# Altium PCB Omid Mazarei.PcbDoc (part 1 of 3)
Units mm, origin at the board's own origin, x right, y up, seen from the top; angles counter-clockwise.
Board outline 297 x 210 mm, 2 copper layers (Top Layer, Bottom Layer); 469 components, 0 nets, 938 pads, 2 vias.
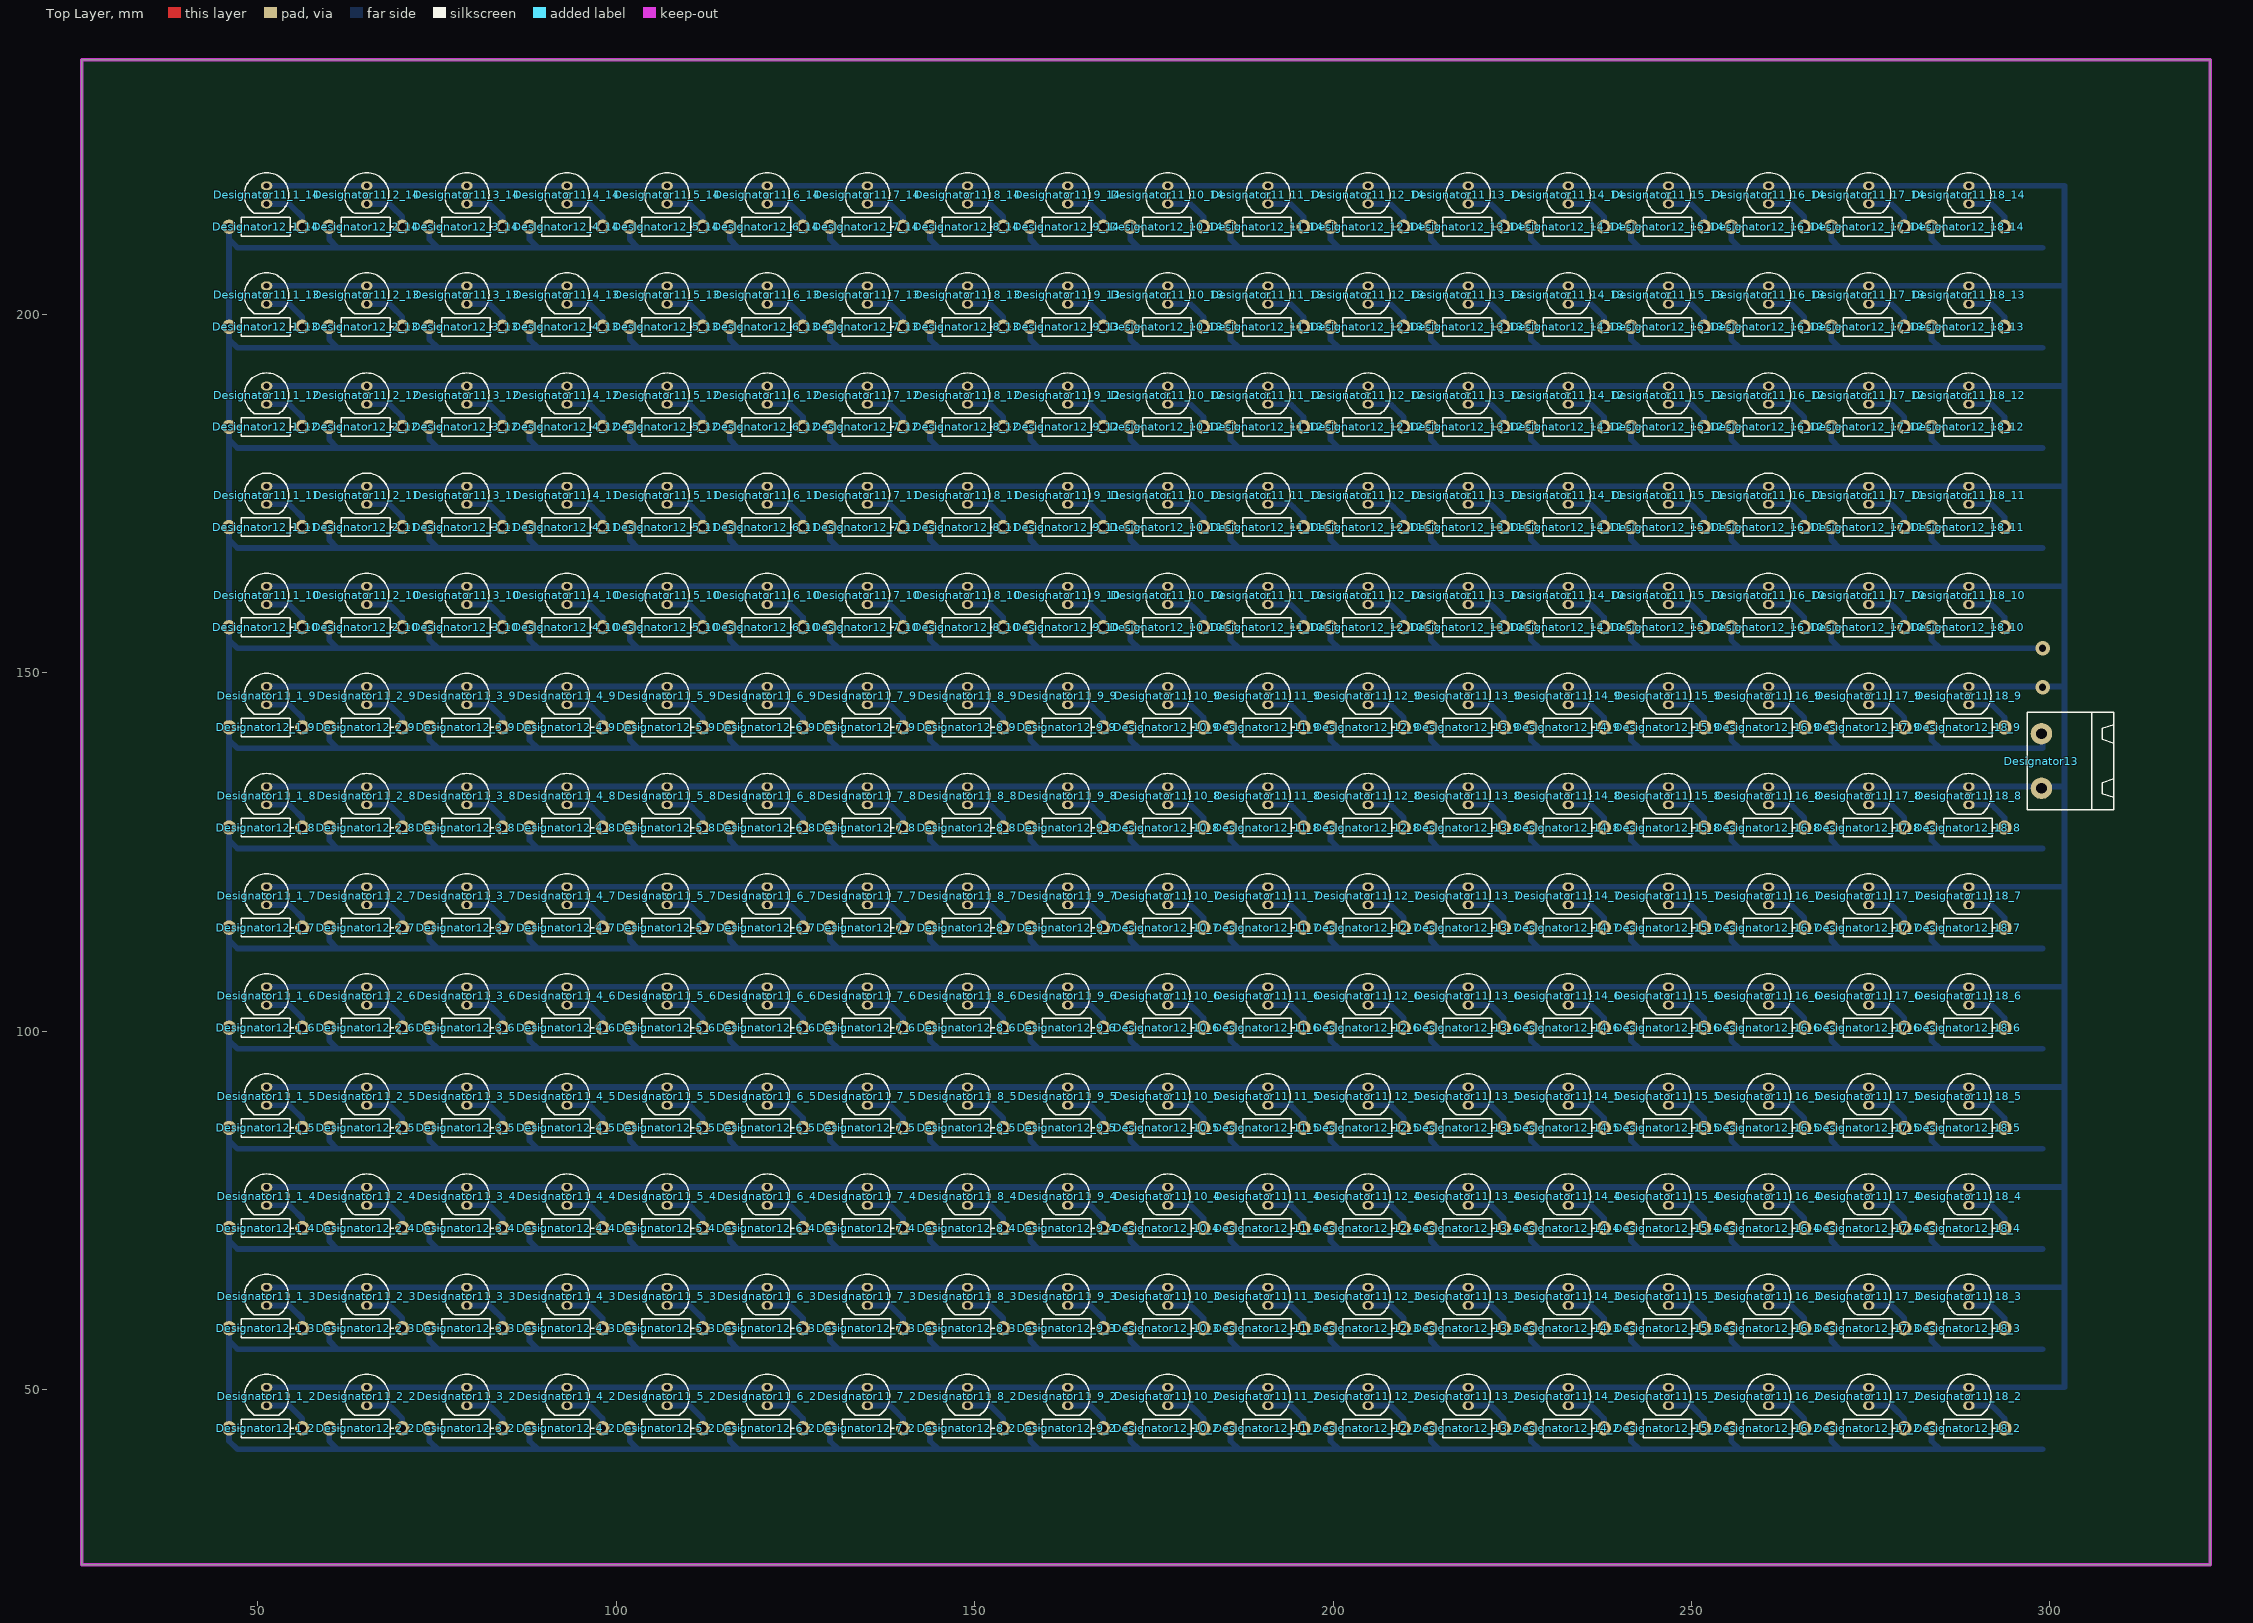
[diagram p0: Top Layer view]
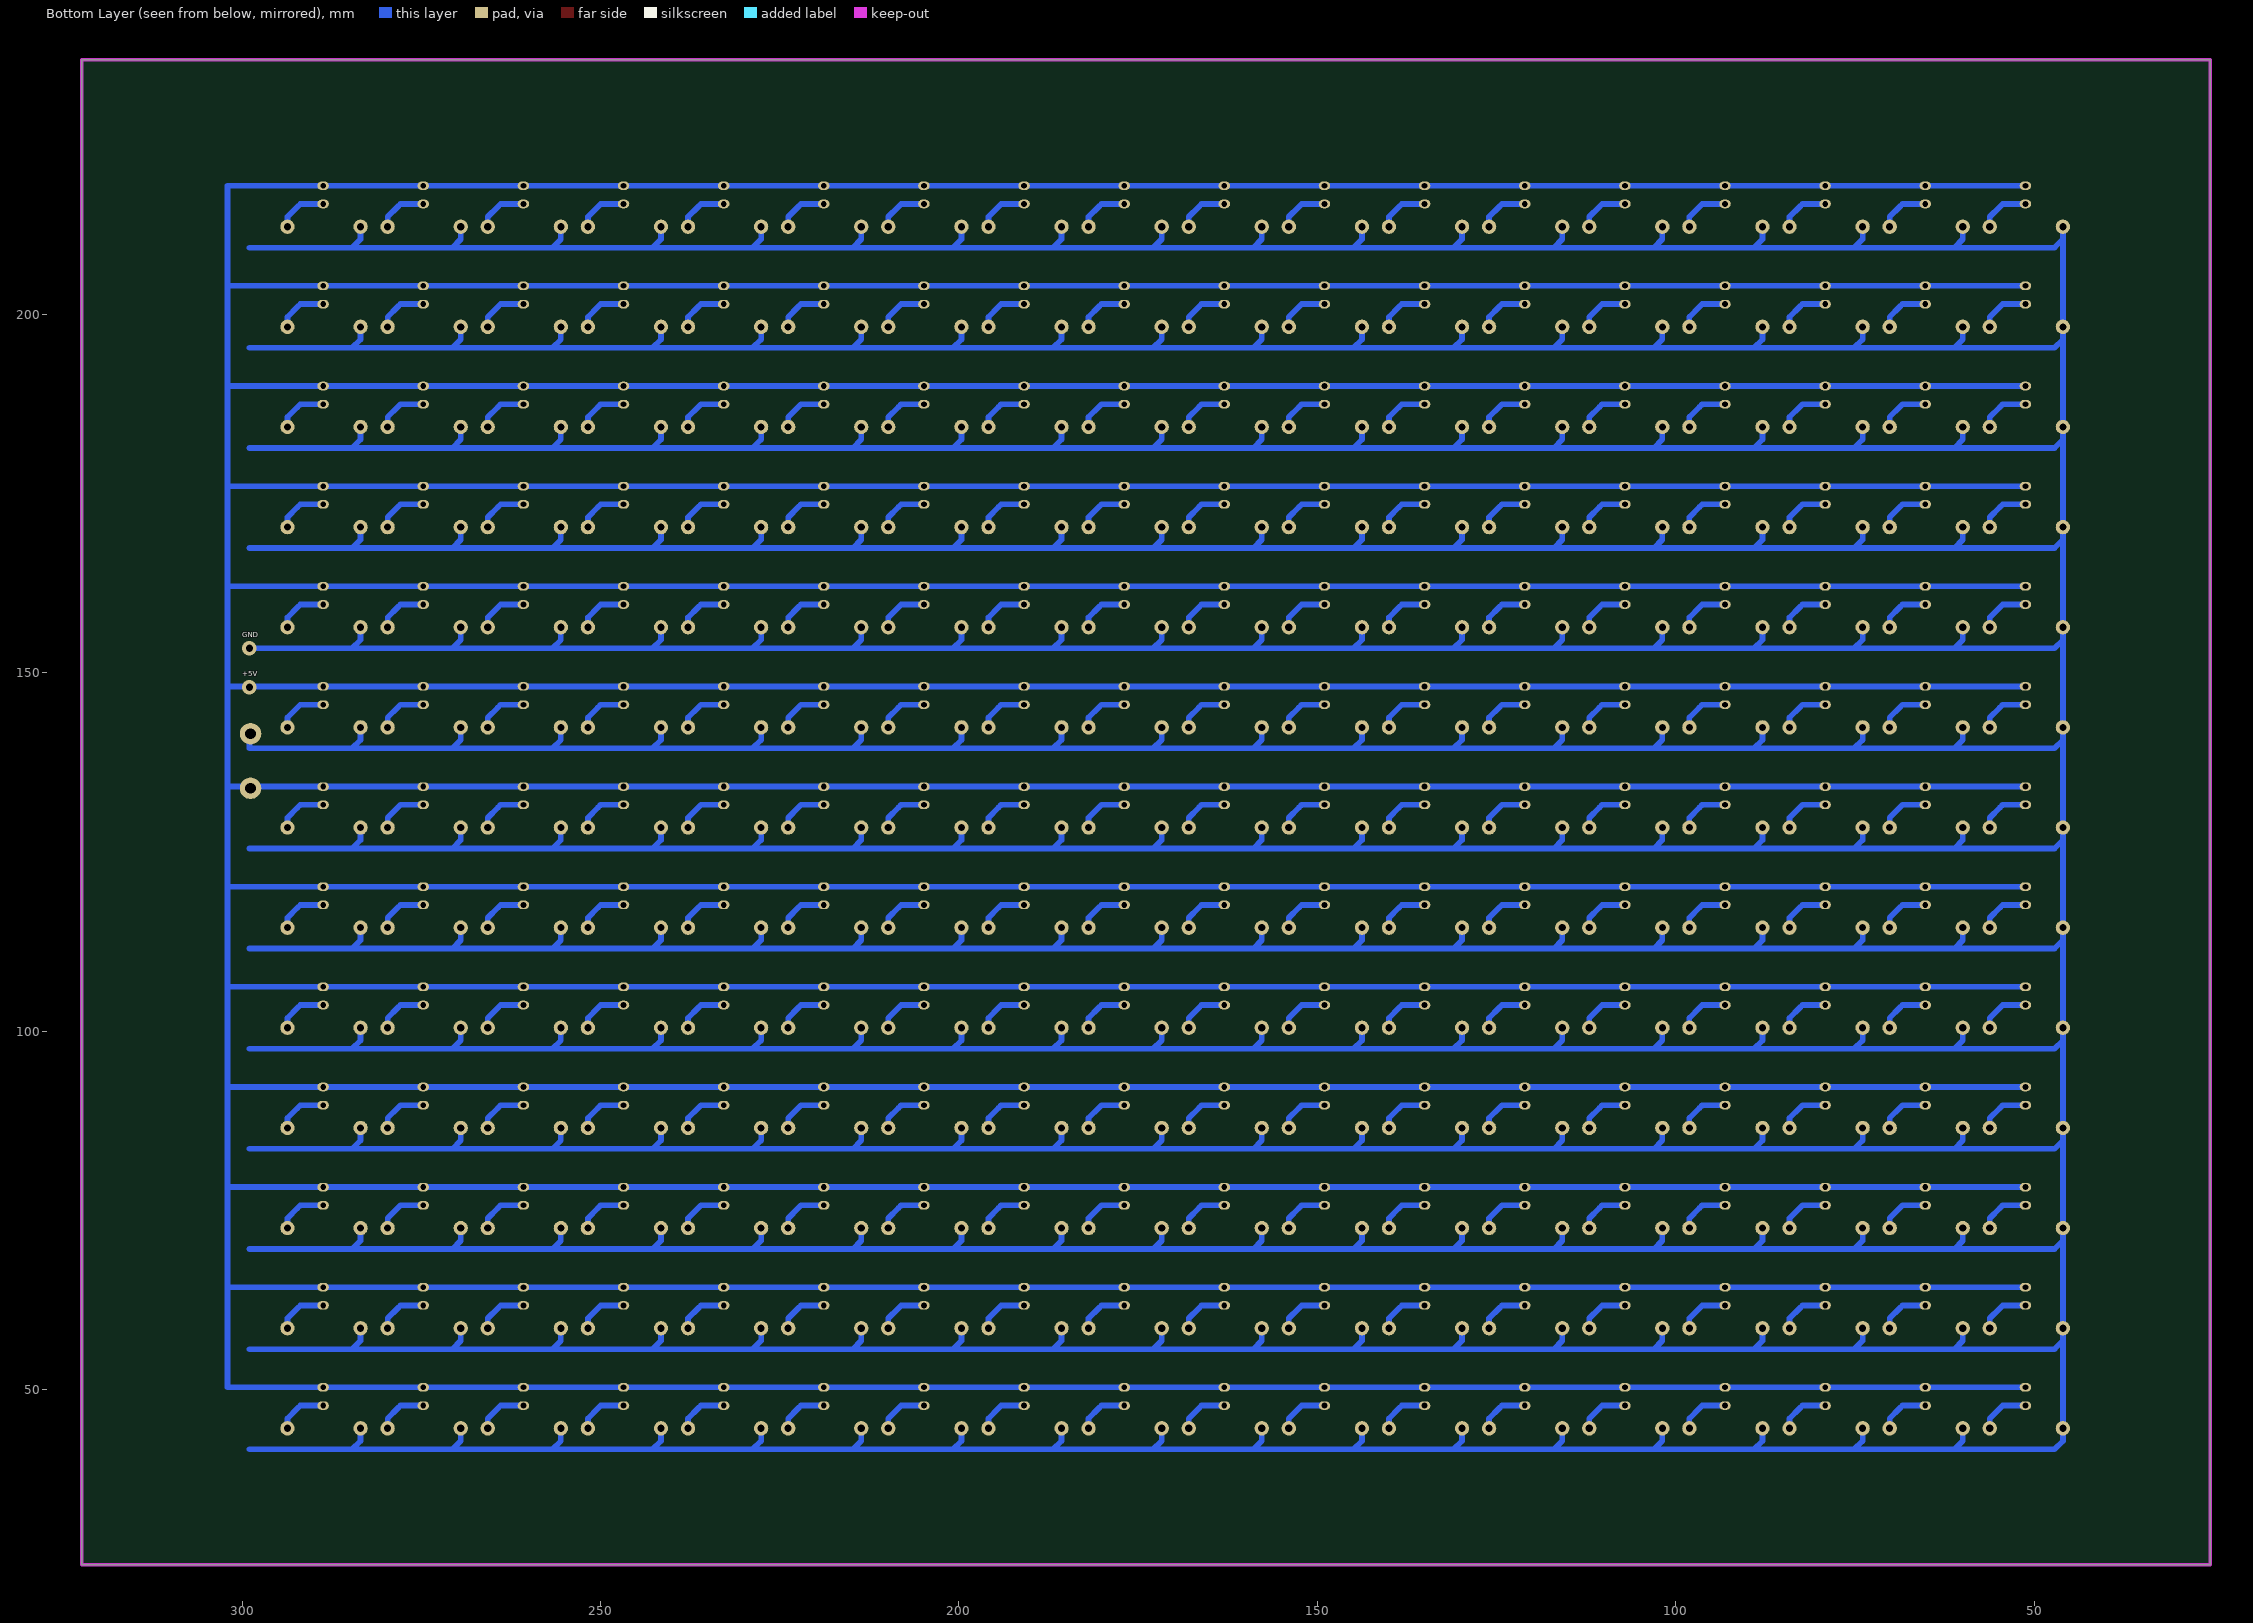
[diagram p1: Bottom Layer view, seen from below]

## Layer stack, top to bottom
Top Solder: solder mask 0.0102, Solder Resist, Dk 3.5
Top Layer: signal copper 0.0356
Dielectric 1: dielectric 0.32, FR-4, Dk 4.8
Bottom Layer: signal copper 0.0356
Bottom Solder: solder mask 0.0102, Solder Resist, Dk 3.5

## Board outline
25.4,25.527 322.4,25.527 322.4,235.527 25.4,235.527

## Design rules (kind name [scope] priority, off if disabled: settings)
Clearance [All] p1: gap=0.254 ignorepadtopadclearanceinfootprint=FALSE except(0: Arc-Hole Track-Hole SMDPad-Hole THPad-Hole Via-Hole Fill-Hole Poly-Hole Region-Hole Text-Hole)
PolygonConnect [All] p1: connectstyle=Relief reliefconductorwidth=0.254 reliefentries=4 polygonreliefangle="90 Angle" airgapwidth=0.254
RoutingVias [All] p1: holewidth=0.711 width=1.27 viastyle="Through Hole" minholewidth=0.711 minwidth=1.27 maxholewidth=1 maxwidth=2
ShortCircuit [All] p1: allowed=TRUE
SolderMaskExpansion [All] p1: expansion=0.102 istentingtop=FALSE
Width [All] p1: maxlimit=0.8 minlimit=0.254 preferedwidth=0.254
29 further rules are at their usual default settings.

## Components (designator, comment, footprint, x,y, rotation, side; value= is the part's Value field where it differs from the comment)
Designator11_1_2 "Comment" LED5MM_RED 51.21,49.014 r270 top
Designator11_1_3 "Comment" LED5MM_RED 51.21,62.984 r270 top
Designator11_1_4 "Comment" LED5MM_RED 51.21,76.954 r270 top
Designator11_1_5 "Comment" LED5MM_RED 51.21,90.924 r270 top
Designator11_1_6 "Comment" LED5MM_RED 51.21,104.894 r270 top
Designator11_1_7 "Comment" LED5MM_RED 51.21,118.864 r270 top
Designator11_1_8 "Comment" LED5MM_RED 51.21,132.834 r270 top
Designator11_1_9 "Comment" LED5MM_RED 51.21,146.804 r270 top
Designator11_1_10 "Comment" LED5MM_RED 51.21,160.774 r270 top
Designator11_1_11 "Comment" LED5MM_RED 51.21,174.744 r270 top
Designator11_1_12 "Comment" LED5MM_RED 51.21,188.714 r270 top
Designator11_1_13 "Comment" LED5MM_RED 51.21,202.684 r270 top
Designator11_1_14 "Comment" LED5MM_RED 51.21,216.654 r270 top
Designator11_2_2 "Comment" LED5MM_RED 65.18,49.014 r270 top
Designator11_2_3 "Comment" LED5MM_RED 65.18,62.984 r270 top
Designator11_2_4 "Comment" LED5MM_RED 65.18,76.954 r270 top
Designator11_2_5 "Comment" LED5MM_RED 65.18,90.924 r270 top
Designator11_2_6 "Comment" LED5MM_RED 65.18,104.894 r270 top
Designator11_2_7 "Comment" LED5MM_RED 65.18,118.864 r270 top
Designator11_2_8 "Comment" LED5MM_RED 65.18,132.834 r270 top
Designator11_2_9 "Comment" LED5MM_RED 65.18,146.804 r270 top
Designator11_2_10 "Comment" LED5MM_RED 65.18,160.774 r270 top
Designator11_2_11 "Comment" LED5MM_RED 65.18,174.744 r270 top
Designator11_2_12 "Comment" LED5MM_RED 65.18,188.714 r270 top
Designator11_2_13 "Comment" LED5MM_RED 65.18,202.684 r270 top
Designator11_2_14 "Comment" LED5MM_RED 65.18,216.654 r270 top
Designator11_3_2 "Comment" LED5MM_RED 79.15,49.014 r270 top
Designator11_3_3 "Comment" LED5MM_RED 79.15,62.984 r270 top
Designator11_3_4 "Comment" LED5MM_RED 79.15,76.954 r270 top
Designator11_3_5 "Comment" LED5MM_RED 79.15,90.924 r270 top
Designator11_3_6 "Comment" LED5MM_RED 79.15,104.894 r270 top
Designator11_3_7 "Comment" LED5MM_RED 79.15,118.864 r270 top
Designator11_3_8 "Comment" LED5MM_RED 79.15,132.834 r270 top
Designator11_3_9 "Comment" LED5MM_RED 79.15,146.804 r270 top
Designator11_3_10 "Comment" LED5MM_RED 79.15,160.774 r270 top
Designator11_3_11 "Comment" LED5MM_RED 79.15,174.744 r270 top
Designator11_3_12 "Comment" LED5MM_RED 79.15,188.714 r270 top
Designator11_3_13 "Comment" LED5MM_RED 79.15,202.684 r270 top
Designator11_3_14 "Comment" LED5MM_RED 79.15,216.654 r270 top
Designator11_4_2 "Comment" LED5MM_RED 93.12,49.014 r270 top
Designator11_4_3 "Comment" LED5MM_RED 93.12,62.984 r270 top
Designator11_4_4 "Comment" LED5MM_RED 93.12,76.954 r270 top
Designator11_4_5 "Comment" LED5MM_RED 93.12,90.924 r270 top
Designator11_4_6 "Comment" LED5MM_RED 93.12,104.894 r270 top
Designator11_4_7 "Comment" LED5MM_RED 93.12,118.864 r270 top
Designator11_4_8 "Comment" LED5MM_RED 93.12,132.834 r270 top
Designator11_4_9 "Comment" LED5MM_RED 93.12,146.804 r270 top
Designator11_4_10 "Comment" LED5MM_RED 93.12,160.774 r270 top
Designator11_4_11 "Comment" LED5MM_RED 93.12,174.744 r270 top
Designator11_4_12 "Comment" LED5MM_RED 93.12,188.714 r270 top
Designator11_4_13 "Comment" LED5MM_RED 93.12,202.684 r270 top
Designator11_4_14 "Comment" LED5MM_RED 93.12,216.654 r270 top
Designator11_5_2 "Comment" LED5MM_RED 107.09,49.014 r270 top
Designator11_5_3 "Comment" LED5MM_RED 107.09,62.984 r270 top
Designator11_5_4 "Comment" LED5MM_RED 107.09,76.954 r270 top
Designator11_5_5 "Comment" LED5MM_RED 107.09,90.924 r270 top
Designator11_5_6 "Comment" LED5MM_RED 107.09,104.894 r270 top
Designator11_5_7 "Comment" LED5MM_RED 107.09,118.864 r270 top
Designator11_5_8 "Comment" LED5MM_RED 107.09,132.834 r270 top
Designator11_5_9 "Comment" LED5MM_RED 107.09,146.804 r270 top
Designator11_5_10 "Comment" LED5MM_RED 107.09,160.774 r270 top
Designator11_5_11 "Comment" LED5MM_RED 107.09,174.744 r270 top
Designator11_5_12 "Comment" LED5MM_RED 107.09,188.714 r270 top
Designator11_5_13 "Comment" LED5MM_RED 107.09,202.684 r270 top
Designator11_5_14 "Comment" LED5MM_RED 107.09,216.654 r270 top
Designator11_6_2 "Comment" LED5MM_RED 121.06,49.014 r270 top
Designator11_6_3 "Comment" LED5MM_RED 121.06,62.984 r270 top
Designator11_6_4 "Comment" LED5MM_RED 121.06,76.954 r270 top
Designator11_6_5 "Comment" LED5MM_RED 121.06,90.924 r270 top
Designator11_6_6 "Comment" LED5MM_RED 121.06,104.894 r270 top
Designator11_6_7 "Comment" LED5MM_RED 121.06,118.864 r270 top
Designator11_6_8 "Comment" LED5MM_RED 121.06,132.834 r270 top
Designator11_6_9 "Comment" LED5MM_RED 121.06,146.804 r270 top
Designator11_6_10 "Comment" LED5MM_RED 121.06,160.774 r270 top
Designator11_6_11 "Comment" LED5MM_RED 121.06,174.744 r270 top
Designator11_6_12 "Comment" LED5MM_RED 121.06,188.714 r270 top
Designator11_6_13 "Comment" LED5MM_RED 121.06,202.684 r270 top
Designator11_6_14 "Comment" LED5MM_RED 121.06,216.654 r270 top
Designator11_7_2 "Comment" LED5MM_RED 135.03,49.014 r270 top
Designator11_7_3 "Comment" LED5MM_RED 135.03,62.984 r270 top
Designator11_7_4 "Comment" LED5MM_RED 135.03,76.954 r270 top
Designator11_7_5 "Comment" LED5MM_RED 135.03,90.924 r270 top
Designator11_7_6 "Comment" LED5MM_RED 135.03,104.894 r270 top
Designator11_7_7 "Comment" LED5MM_RED 135.03,118.864 r270 top
Designator11_7_8 "Comment" LED5MM_RED 135.03,132.834 r270 top
Designator11_7_9 "Comment" LED5MM_RED 135.03,146.804 r270 top
Designator11_7_10 "Comment" LED5MM_RED 135.03,160.774 r270 top
Designator11_7_11 "Comment" LED5MM_RED 135.03,174.744 r270 top
Designator11_7_12 "Comment" LED5MM_RED 135.03,188.714 r270 top
Designator11_7_13 "Comment" LED5MM_RED 135.03,202.684 r270 top
Designator11_7_14 "Comment" LED5MM_RED 135.03,216.654 r270 top
Designator11_8_2 "Comment" LED5MM_RED 149,49.014 r270 top
Designator11_8_3 "Comment" LED5MM_RED 149,62.984 r270 top
Designator11_8_4 "Comment" LED5MM_RED 149,76.954 r270 top
Designator11_8_5 "Comment" LED5MM_RED 149,90.924 r270 top
Designator11_8_6 "Comment" LED5MM_RED 149,104.894 r270 top
Designator11_8_7 "Comment" LED5MM_RED 149,118.864 r270 top
Designator11_8_8 "Comment" LED5MM_RED 149,132.834 r270 top
Designator11_8_9 "Comment" LED5MM_RED 149,146.804 r270 top
Designator11_8_10 "Comment" LED5MM_RED 149,160.774 r270 top
Designator11_8_11 "Comment" LED5MM_RED 149,174.744 r270 top
Designator11_8_12 "Comment" LED5MM_RED 149,188.714 r270 top
Designator11_8_13 "Comment" LED5MM_RED 149,202.684 r270 top
Designator11_8_14 "Comment" LED5MM_RED 149,216.654 r270 top
Designator11_9_2 "Comment" LED5MM_RED 162.97,49.014 r270 top
Designator11_9_3 "Comment" LED5MM_RED 162.97,62.984 r270 top
Designator11_9_4 "Comment" LED5MM_RED 162.97,76.954 r270 top
Designator11_9_5 "Comment" LED5MM_RED 162.97,90.924 r270 top
Designator11_9_6 "Comment" LED5MM_RED 162.97,104.894 r270 top
Designator11_9_7 "Comment" LED5MM_RED 162.97,118.864 r270 top
Designator11_9_8 "Comment" LED5MM_RED 162.97,132.834 r270 top
Designator11_9_9 "Comment" LED5MM_RED 162.97,146.804 r270 top
Designator11_9_10 "Comment" LED5MM_RED 162.97,160.774 r270 top
Designator11_9_11 "Comment" LED5MM_RED 162.97,174.744 r270 top
Designator11_9_12 "Comment" LED5MM_RED 162.97,188.714 r270 top
Designator11_9_13 "Comment" LED5MM_RED 162.97,202.684 r270 top
Designator11_9_14 "Comment" LED5MM_RED 162.97,216.654 r270 top
Designator11_10_2 "Comment" LED5MM_RED 176.94,49.014 r270 top
Designator11_10_3 "Comment" LED5MM_RED 176.94,62.984 r270 top
Designator11_10_4 "Comment" LED5MM_RED 176.94,76.954 r270 top
Designator11_10_5 "Comment" LED5MM_RED 176.94,90.924 r270 top
Designator11_10_6 "Comment" LED5MM_RED 176.94,104.894 r270 top
Designator11_10_7 "Comment" LED5MM_RED 176.94,118.864 r270 top
Designator11_10_8 "Comment" LED5MM_RED 176.94,132.834 r270 top
Designator11_10_9 "Comment" LED5MM_RED 176.94,146.804 r270 top
Designator11_10_10 "Comment" LED5MM_RED 176.94,160.774 r270 top
Designator11_10_11 "Comment" LED5MM_RED 176.94,174.744 r270 top
Designator11_10_12 "Comment" LED5MM_RED 176.94,188.714 r270 top
Designator11_10_13 "Comment" LED5MM_RED 176.94,202.684 r270 top
Designator11_10_14 "Comment" LED5MM_RED 176.94,216.654 r270 top
Designator11_11_2 "Comment" LED5MM_RED 190.91,49.014 r270 top
Designator11_11_3 "Comment" LED5MM_RED 190.91,62.984 r270 top
Designator11_11_4 "Comment" LED5MM_RED 190.91,76.954 r270 top
Designator11_11_5 "Comment" LED5MM_RED 190.91,90.924 r270 top
Designator11_11_6 "Comment" LED5MM_RED 190.91,104.894 r270 top
Designator11_11_7 "Comment" LED5MM_RED 190.91,118.864 r270 top
Designator11_11_8 "Comment" LED5MM_RED 190.91,132.834 r270 top
Designator11_11_9 "Comment" LED5MM_RED 190.91,146.804 r270 top
Designator11_11_10 "Comment" LED5MM_RED 190.91,160.774 r270 top
Designator11_11_11 "Comment" LED5MM_RED 190.91,174.744 r270 top
Designator11_11_12 "Comment" LED5MM_RED 190.91,188.714 r270 top
Designator11_11_13 "Comment" LED5MM_RED 190.91,202.684 r270 top
Designator11_11_14 "Comment" LED5MM_RED 190.91,216.654 r270 top
Designator11_12_2 "Comment" LED5MM_RED 204.88,49.014 r270 top
Designator11_12_3 "Comment" LED5MM_RED 204.88,62.984 r270 top
Designator11_12_4 "Comment" LED5MM_RED 204.88,76.954 r270 top
Designator11_12_5 "Comment" LED5MM_RED 204.88,90.924 r270 top
Designator11_12_6 "Comment" LED5MM_RED 204.88,104.894 r270 top
Designator11_12_7 "Comment" LED5MM_RED 204.88,118.864 r270 top
Designator11_12_8 "Comment" LED5MM_RED 204.88,132.834 r270 top
Designator11_12_9 "Comment" LED5MM_RED 204.88,146.804 r270 top
Designator11_12_10 "Comment" LED5MM_RED 204.88,160.774 r270 top
Designator11_12_11 "Comment" LED5MM_RED 204.88,174.744 r270 top
Designator11_12_12 "Comment" LED5MM_RED 204.88,188.714 r270 top
Designator11_12_13 "Comment" LED5MM_RED 204.88,202.684 r270 top
Designator11_12_14 "Comment" LED5MM_RED 204.88,216.654 r270 top
Designator11_13_2 "Comment" LED5MM_RED 218.85,49.014 r270 top
Designator11_13_3 "Comment" LED5MM_RED 218.85,62.984 r270 top
Designator11_13_4 "Comment" LED5MM_RED 218.85,76.954 r270 top
Designator11_13_5 "Comment" LED5MM_RED 218.85,90.924 r270 top
Designator11_13_6 "Comment" LED5MM_RED 218.85,104.894 r270 top
Designator11_13_7 "Comment" LED5MM_RED 218.85,118.864 r270 top
Designator11_13_8 "Comment" LED5MM_RED 218.85,132.834 r270 top
Designator11_13_9 "Comment" LED5MM_RED 218.85,146.804 r270 top
Designator11_13_10 "Comment" LED5MM_RED 218.85,160.774 r270 top
Designator11_13_11 "Comment" LED5MM_RED 218.85,174.744 r270 top
Designator11_13_12 "Comment" LED5MM_RED 218.85,188.714 r270 top
Designator11_13_13 "Comment" LED5MM_RED 218.85,202.684 r270 top
Designator11_13_14 "Comment" LED5MM_RED 218.85,216.654 r270 top
Designator11_14_2 "Comment" LED5MM_RED 232.82,49.014 r270 top
Designator11_14_3 "Comment" LED5MM_RED 232.82,62.984 r270 top
Designator11_14_4 "Comment" LED5MM_RED 232.82,76.954 r270 top
Designator11_14_5 "Comment" LED5MM_RED 232.82,90.924 r270 top
Designator11_14_6 "Comment" LED5MM_RED 232.82,104.894 r270 top
Designator11_14_7 "Comment" LED5MM_RED 232.82,118.864 r270 top
Designator11_14_8 "Comment" LED5MM_RED 232.82,132.834 r270 top
Designator11_14_9 "Comment" LED5MM_RED 232.82,146.804 r270 top
Designator11_14_10 "Comment" LED5MM_RED 232.82,160.774 r270 top
Designator11_14_11 "Comment" LED5MM_RED 232.82,174.744 r270 top
Designator11_14_12 "Comment" LED5MM_RED 232.82,188.714 r270 top
Designator11_14_13 "Comment" LED5MM_RED 232.82,202.684 r270 top
Designator11_14_14 "Comment" LED5MM_RED 232.82,216.654 r270 top
Designator11_15_2 "Comment" LED5MM_RED 246.79,49.014 r270 top
Designator11_15_3 "Comment" LED5MM_RED 246.79,62.984 r270 top
Designator11_15_4 "Comment" LED5MM_RED 246.79,76.954 r270 top
Designator11_15_5 "Comment" LED5MM_RED 246.79,90.924 r270 top
Designator11_15_6 "Comment" LED5MM_RED 246.79,104.894 r270 top
Designator11_15_7 "Comment" LED5MM_RED 246.79,118.864 r270 top
Designator11_15_8 "Comment" LED5MM_RED 246.79,132.834 r270 top
Designator11_15_9 "Comment" LED5MM_RED 246.79,146.804 r270 top
Designator11_15_10 "Comment" LED5MM_RED 246.79,160.774 r270 top
Designator11_15_11 "Comment" LED5MM_RED 246.79,174.744 r270 top
Designator11_15_12 "Comment" LED5MM_RED 246.79,188.714 r270 top
Designator11_15_13 "Comment" LED5MM_RED 246.79,202.684 r270 top
Designator11_15_14 "Comment" LED5MM_RED 246.79,216.654 r270 top
Designator11_16_2 "Comment" LED5MM_RED 260.76,49.014 r270 top
Designator11_16_3 "Comment" LED5MM_RED 260.76,62.984 r270 top
Designator11_16_4 "Comment" LED5MM_RED 260.76,76.954 r270 top
Designator11_16_5 "Comment" LED5MM_RED 260.76,90.924 r270 top
Designator11_16_6 "Comment" LED5MM_RED 260.76,104.894 r270 top
Designator11_16_7 "Comment" LED5MM_RED 260.76,118.864 r270 top
Designator11_16_8 "Comment" LED5MM_RED 260.76,132.834 r270 top
Designator11_16_9 "Comment" LED5MM_RED 260.76,146.804 r270 top
Designator11_16_10 "Comment" LED5MM_RED 260.76,160.774 r270 top
Designator11_16_11 "Comment" LED5MM_RED 260.76,174.744 r270 top
Designator11_16_12 "Comment" LED5MM_RED 260.76,188.714 r270 top
Designator11_16_13 "Comment" LED5MM_RED 260.76,202.684 r270 top
Designator11_16_14 "Comment" LED5MM_RED 260.76,216.654 r270 top
Designator11_17_2 "Comment" LED5MM_RED 274.73,49.014 r270 top
Designator11_17_3 "Comment" LED5MM_RED 274.73,62.984 r270 top
Designator11_17_4 "Comment" LED5MM_RED 274.73,76.954 r270 top
Designator11_17_5 "Comment" LED5MM_RED 274.73,90.924 r270 top
Designator11_17_6 "Comment" LED5MM_RED 274.73,104.894 r270 top
Designator11_17_7 "Comment" LED5MM_RED 274.73,118.864 r270 top
Designator11_17_8 "Comment" LED5MM_RED 274.73,132.834 r270 top
Designator11_17_9 "Comment" LED5MM_RED 274.73,146.804 r270 top
Designator11_17_10 "Comment" LED5MM_RED 274.73,160.774 r270 top
Designator11_17_11 "Comment" LED5MM_RED 274.73,174.744 r270 top
Designator11_17_12 "Comment" LED5MM_RED 274.73,188.714 r270 top
Designator11_17_13 "Comment" LED5MM_RED 274.73,202.684 r270 top
Designator11_17_14 "Comment" LED5MM_RED 274.73,216.654 r270 top
Designator11_18_2 "Comment" LED5MM_RED 288.7,49.014 r270 top
Designator11_18_3 "Comment" LED5MM_RED 288.7,62.984 r270 top
Designator11_18_4 "Comment" LED5MM_RED 288.7,76.954 r270 top
Designator11_18_5 "Comment" LED5MM_RED 288.7,90.924 r270 top
Designator11_18_6 "Comment" LED5MM_RED 288.7,104.894 r270 top
Designator11_18_7 "Comment" LED5MM_RED 288.7,118.864 r270 top
Designator11_18_8 "Comment" LED5MM_RED 288.7,132.834 r270 top
Designator11_18_9 "Comment" LED5MM_RED 288.7,146.804 r270 top
Designator11_18_10 "Comment" LED5MM_RED 288.7,160.774 r270 top
Designator11_18_11 "Comment" LED5MM_RED 288.7,174.744 r270 top
Designator11_18_12 "Comment" LED5MM_RED 288.7,188.714 r270 top
Designator11_18_13 "Comment" LED5MM_RED 288.7,202.684 r270 top
Designator11_18_14 "Comment" LED5MM_RED 288.7,216.654 r270 top
Designator12_1_2 "1K" R025W_AX04 51.083,44.569 r0 top
Designator12_1_3 "1K" R025W_AX04 51.083,58.539 r0 top
Designator12_1_4 "1K" R025W_AX04 51.083,72.509 r0 top
Designator12_1_5 "1K" R025W_AX04 51.083,86.479 r0 top
Designator12_1_6 "1K" R025W_AX04 51.083,100.449 r0 top
Designator12_1_7 "1K" R025W_AX04 51.083,114.419 r0 top
Designator12_1_8 "1K" R025W_AX04 51.083,128.389 r0 top
Designator12_1_9 "1K" R025W_AX04 51.083,142.359 r0 top
Designator12_1_10 "1K" R025W_AX04 51.083,156.329 r0 top
Designator12_1_11 "1K" R025W_AX04 51.083,170.299 r0 top
Designator12_1_12 "1K" R025W_AX04 51.083,184.269 r0 top
Designator12_1_13 "1K" R025W_AX04 51.083,198.239 r0 top
Designator12_1_14 "1K" R025W_AX04 51.083,212.209 r0 top
Designator12_2_2 "1K" R025W_AX04 65.053,44.569 r0 top
Designator12_2_3 "1K" R025W_AX04 65.053,58.539 r0 top
Designator12_2_4 "1K" R025W_AX04 65.053,72.509 r0 top
Designator12_2_5 "1K" R025W_AX04 65.053,86.479 r0 top
Designator12_2_6 "1K" R025W_AX04 65.053,100.449 r0 top
Designator12_2_7 "1K" R025W_AX04 65.053,114.419 r0 top
Designator12_2_8 "1K" R025W_AX04 65.053,128.389 r0 top
Designator12_2_9 "1K" R025W_AX04 65.053,142.359 r0 top
Designator12_2_10 "1K" R025W_AX04 65.053,156.329 r0 top
Designator12_2_11 "1K" R025W_AX04 65.053,170.299 r0 top
Designator12_2_12 "1K" R025W_AX04 65.053,184.269 r0 top
Designator12_2_13 "1K" R025W_AX04 65.053,198.239 r0 top
Designator12_2_14 "1K" R025W_AX04 65.053,212.209 r0 top
Designator12_3_2 "1K" R025W_AX04 79.023,44.569 r0 top
Designator12_3_3 "1K" R025W_AX04 79.023,58.539 r0 top
Designator12_3_4 "1K" R025W_AX04 79.023,72.509 r0 top
Designator12_3_5 "1K" R025W_AX04 79.023,86.479 r0 top
Designator12_3_6 "1K" R025W_AX04 79.023,100.449 r0 top
Designator12_3_7 "1K" R025W_AX04 79.023,114.419 r0 top
Designator12_3_8 "1K" R025W_AX04 79.023,128.389 r0 top
Designator12_3_9 "1K" R025W_AX04 79.023,142.359 r0 top
Designator12_3_10 "1K" R025W_AX04 79.023,156.329 r0 top
Designator12_3_11 "1K" R025W_AX04 79.023,170.299 r0 top
Designator12_3_12 "1K" R025W_AX04 79.023,184.269 r0 top
Designator12_3_13 "1K" R025W_AX04 79.023,198.239 r0 top
Designator12_3_14 "1K" R025W_AX04 79.023,212.209 r0 top
Designator12_4_2 "1K" R025W_AX04 92.993,44.569 r0 top
Designator12_4_3 "1K" R025W_AX04 92.993,58.539 r0 top
Designator12_4_4 "1K" R025W_AX04 92.993,72.509 r0 top
Designator12_4_5 "1K" R025W_AX04 92.993,86.479 r0 top
Designator12_4_6 "1K" R025W_AX04 92.993,100.449 r0 top
Designator12_4_7 "1K" R025W_AX04 92.993,114.419 r0 top
Designator12_4_8 "1K" R025W_AX04 92.993,128.389 r0 top
Designator12_4_9 "1K" R025W_AX04 92.993,142.359 r0 top
Designator12_4_10 "1K" R025W_AX04 92.993,156.329 r0 top
Designator12_4_11 "1K" R025W_AX04 92.993,170.299 r0 top
Designator12_4_12 "1K" R025W_AX04 92.993,184.269 r0 top
Designator12_4_13 "1K" R025W_AX04 92.993,198.239 r0 top
Designator12_4_14 "1K" R025W_AX04 92.993,212.209 r0 top
Designator12_5_2 "1K" R025W_AX04 106.963,44.569 r0 top
Designator12_5_3 "1K" R025W_AX04 106.963,58.539 r0 top
Designator12_5_4 "1K" R025W_AX04 106.963,72.509 r0 top
Designator12_5_5 "1K" R025W_AX04 106.963,86.479 r0 top
Designator12_5_6 "1K" R025W_AX04 106.963,100.449 r0 top
Designator12_5_7 "1K" R025W_AX04 106.963,114.419 r0 top
Designator12_5_8 "1K" R025W_AX04 106.963,128.389 r0 top
Designator12_5_9 "1K" R025W_AX04 106.963,142.359 r0 top
Designator12_5_10 "1K" R025W_AX04 106.963,156.329 r0 top
Designator12_5_11 "1K" R025W_AX04 106.963,170.299 r0 top
Designator12_5_12 "1K" R025W_AX04 106.963,184.269 r0 top
Designator12_5_13 "1K" R025W_AX04 106.963,198.239 r0 top
Designator12_5_14 "1K" R025W_AX04 106.963,212.209 r0 top
Designator12_6_2 "1K" R025W_AX04 120.933,44.569 r0 top
Designator12_6_3 "1K" R025W_AX04 120.933,58.539 r0 top
Designator12_6_4 "1K" R025W_AX04 120.933,72.509 r0 top
Designator12_6_5 "1K" R025W_AX04 120.933,86.479 r0 top
Designator12_6_6 "1K" R025W_AX04 120.933,100.449 r0 top
Designator12_6_7 "1K" R025W_AX04 120.933,114.419 r0 top
Designator12_6_8 "1K" R025W_AX04 120.933,128.389 r0 top
Designator12_6_9 "1K" R025W_AX04 120.933,142.359 r0 top
Designator12_6_10 "1K" R025W_AX04 120.933,156.329 r0 top
Designator12_6_11 "1K" R025W_AX04 120.933,170.299 r0 top
Designator12_6_12 "1K" R025W_AX04 120.933,184.269 r0 top
Designator12_6_13 "1K" R025W_AX04 120.933,198.239 r0 top
Designator12_6_14 "1K" R025W_AX04 120.933,212.209 r0 top
Designator12_7_2 "1K" R025W_AX04 134.903,44.569 r0 top
Designator12_7_3 "1K" R025W_AX04 134.903,58.539 r0 top
Designator12_7_4 "1K" R025W_AX04 134.903,72.509 r0 top
Designator12_7_5 "1K" R025W_AX04 134.903,86.479 r0 top
Designator12_7_6 "1K" R025W_AX04 134.903,100.449 r0 top
Designator12_7_7 "1K" R025W_AX04 134.903,114.419 r0 top
Designator12_7_8 "1K" R025W_AX04 134.903,128.389 r0 top
Designator12_7_9 "1K" R025W_AX04 134.903,142.359 r0 top
Designator12_7_10 "1K" R025W_AX04 134.903,156.329 r0 top
Designator12_7_11 "1K" R025W_AX04 134.903,170.299 r0 top
Designator12_7_12 "1K" R025W_AX04 134.903,184.269 r0 top
Designator12_7_13 "1K" R025W_AX04 134.903,198.239 r0 top
Designator12_7_14 "1K" R025W_AX04 134.903,212.209 r0 top
Designator12_8_2 "1K" R025W_AX04 148.873,44.569 r0 top
Designator12_8_3 "1K" R025W_AX04 148.873,58.539 r0 top
Designator12_8_4 "1K" R025W_AX04 148.873,72.509 r0 top
Designator12_8_5 "1K" R025W_AX04 148.873,86.479 r0 top
Designator12_8_6 "1K" R025W_AX04 148.873,100.449 r0 top
Designator12_8_7 "1K" R025W_AX04 148.873,114.419 r0 top
Designator12_8_8 "1K" R025W_AX04 148.873,128.389 r0 top
Designator12_8_9 "1K" R025W_AX04 148.873,142.359 r0 top
Designator12_8_10 "1K" R025W_AX04 148.873,156.329 r0 top
Designator12_8_11 "1K" R025W_AX04 148.873,170.299 r0 top
Designator12_8_12 "1K" R025W_AX04 148.873,184.269 r0 top
Designator12_8_13 "1K" R025W_AX04 148.873,198.239 r0 top
Designator12_8_14 "1K" R025W_AX04 148.873,212.209 r0 top
Designator12_9_2 "1K" R025W_AX04 162.843,44.569 r0 top
Designator12_9_3 "1K" R025W_AX04 162.843,58.539 r0 top
Designator12_9_4 "1K" R025W_AX04 162.843,72.509 r0 top
Designator12_9_5 "1K" R025W_AX04 162.843,86.479 r0 top
Designator12_9_6 "1K" R025W_AX04 162.843,100.449 r0 top
Designator12_9_7 "1K" R025W_AX04 162.843,114.419 r0 top
Designator12_9_8 "1K" R025W_AX04 162.843,128.389 r0 top
Designator12_9_9 "1K" R025W_AX04 162.843,142.359 r0 top
Designator12_9_10 "1K" R025W_AX04 162.843,156.329 r0 top
Designator12_9_11 "1K" R025W_AX04 162.843,170.299 r0 top
Designator12_9_12 "1K" R025W_AX04 162.843,184.269 r0 top
Designator12_9_13 "1K" R025W_AX04 162.843,198.239 r0 top
Designator12_9_14 "1K" R025W_AX04 162.843,212.209 r0 top
Designator12_10_2 "1K" R025W_AX04 176.813,44.569 r0 top
Designator12_10_3 "1K" R025W_AX04 176.813,58.539 r0 top
Designator12_10_4 "1K" R025W_AX04 176.813,72.509 r0 top
Designator12_10_5 "1K" R025W_AX04 176.813,86.479 r0 top
Designator12_10_6 "1K" R025W_AX04 176.813,100.449 r0 top
Designator12_10_7 "1K" R025W_AX04 176.813,114.419 r0 top
Designator12_10_8 "1K" R025W_AX04 176.813,128.389 r0 top
Designator12_10_9 "1K" R025W_AX04 176.813,142.359 r0 top
Designator12_10_10 "1K" R025W_AX04 176.813,156.329 r0 top
Designator12_10_11 "1K" R025W_AX04 176.813,170.299 r0 top
Designator12_10_12 "1K" R025W_AX04 176.813,184.269 r0 top
Designator12_10_13 "1K" R025W_AX04 176.813,198.239 r0 top
Designator12_10_14 "1K" R025W_AX04 176.813,212.209 r0 top
Designator12_11_2 "1K" R025W_AX04 190.783,44.569 r0 top
Designator12_11_3 "1K" R025W_AX04 190.783,58.539 r0 top
Designator12_11_4 "1K" R025W_AX04 190.783,72.509 r0 top
Designator12_11_5 "1K" R025W_AX04 190.783,86.479 r0 top
Designator12_11_6 "1K" R025W_AX04 190.783,100.449 r0 top
Designator12_11_7 "1K" R025W_AX04 190.783,114.419 r0 top
Designator12_11_8 "1K" R025W_AX04 190.783,128.389 r0 top
Designator12_11_9 "1K" R025W_AX04 190.783,142.359 r0 top
Designator12_11_10 "1K" R025W_AX04 190.783,156.329 r0 top
Designator12_11_11 "1K" R025W_AX04 190.783,170.299 r0 top
Designator12_11_12 "1K" R025W_AX04 190.783,184.269 r0 top
Designator12_11_13 "1K" R025W_AX04 190.783,198.239 r0 top
Designator12_11_14 "1K" R025W_AX04 190.783,212.209 r0 top
Designator12_12_2 "1K" R025W_AX04 204.753,44.569 r0 top
Designator12_12_3 "1K" R025W_AX04 204.753,58.539 r0 top
Designator12_12_4 "1K" R025W_AX04 204.753,72.509 r0 top
Designator12_12_5 "1K" R025W_AX04 204.753,86.479 r0 top
Designator12_12_6 "1K" R025W_AX04 204.753,100.449 r0 top
Designator12_12_7 "1K" R025W_AX04 204.753,114.419 r0 top
Designator12_12_8 "1K" R025W_AX04 204.753,128.389 r0 top
Designator12_12_9 "1K" R025W_AX04 204.753,142.359 r0 top
Designator12_12_10 "1K" R025W_AX04 204.753,156.329 r0 top
Designator12_12_11 "1K" R025W_AX04 204.753,170.299 r0 top
Designator12_12_12 "1K" R025W_AX04 204.753,184.269 r0 top
Designator12_12_13 "1K" R025W_AX04 204.753,198.239 r0 top
Designator12_12_14 "1K" R025W_AX04 204.753,212.209 r0 top
Designator12_13_2 "1K" R025W_AX04 218.723,44.569 r0 top
Designator12_13_3 "1K" R025W_AX04 218.723,58.539 r0 top
Designator12_13_4 "1K" R025W_AX04 218.723,72.509 r0 top
Designator12_13_5 "1K" R025W_AX04 218.723,86.479 r0 top
Designator12_13_6 "1K" R025W_AX04 218.723,100.449 r0 top
Designator12_13_7 "1K" R025W_AX04 218.723,114.419 r0 top
Designator12_13_8 "1K" R025W_AX04 218.723,128.389 r0 top
Designator12_13_9 "1K" R025W_AX04 218.723,142.359 r0 top
Designator12_13_10 "1K" R025W_AX04 218.723,156.329 r0 top
Designator12_13_11 "1K" R025W_AX04 218.723,170.299 r0 top
Designator12_13_12 "1K" R025W_AX04 218.723,184.269 r0 top
Designator12_13_13 "1K" R025W_AX04 218.723,198.239 r0 top
Designator12_13_14 "1K" R025W_AX04 218.723,212.209 r0 top
Designator12_14_2 "1K" R025W_AX04 232.693,44.569 r0 top
Designator12_14_3 "1K" R025W_AX04 232.693,58.539 r0 top
Designator12_14_4 "1K" R025W_AX04 232.693,72.509 r0 top
Designator12_14_5 "1K" R025W_AX04 232.693,86.479 r0 top
Designator12_14_6 "1K" R025W_AX04 232.693,100.449 r0 top
Designator12_14_7 "1K" R025W_AX04 232.693,114.419 r0 top
Designator12_14_8 "1K" R025W_AX04 232.693,128.389 r0 top
Designator12_14_9 "1K" R025W_AX04 232.693,142.359 r0 top
Designator12_14_10 "1K" R025W_AX04 232.693,156.329 r0 top
Designator12_14_11 "1K" R025W_AX04 232.693,170.299 r0 top
Designator12_14_12 "1K" R025W_AX04 232.693,184.269 r0 top
Designator12_14_13 "1K" R025W_AX04 232.693,198.239 r0 top
Designator12_14_14 "1K" R025W_AX04 232.693,212.209 r0 top
Designator12_15_2 "1K" R025W_AX04 246.663,44.569 r0 top
Designator12_15_3 "1K" R025W_AX04 246.663,58.539 r0 top
Designator12_15_4 "1K" R025W_AX04 246.663,72.509 r0 top
Designator12_15_5 "1K" R025W_AX04 246.663,86.479 r0 top
Designator12_15_6 "1K" R025W_AX04 246.663,100.449 r0 top
Designator12_15_7 "1K" R025W_AX04 246.663,114.419 r0 top
Designator12_15_8 "1K" R025W_AX04 246.663,128.389 r0 top
Designator12_15_9 "1K" R025W_AX04 246.663,142.359 r0 top
Designator12_15_10 "1K" R025W_AX04 246.663,156.329 r0 top
Designator12_15_11 "1K" R025W_AX04 246.663,170.299 r0 top
Designator12_15_12 "1K" R025W_AX04 246.663,184.269 r0 top
Designator12_15_13 "1K" R025W_AX04 246.663,198.239 r0 top
Designator12_15_14 "1K" R025W_AX04 246.663,212.209 r0 top
Designator12_16_2 "1K" R025W_AX04 260.633,44.569 r0 top
Designator12_16_3 "1K" R025W_AX04 260.633,58.539 r0 top
Designator12_16_4 "1K" R025W_AX04 260.633,72.509 r0 top
Designator12_16_5 "1K" R025W_AX04 260.633,86.479 r0 top
Designator12_16_6 "1K" R025W_AX04 260.633,100.449 r0 top
Designator12_16_7 "1K" R025W_AX04 260.633,114.419 r0 top
Designator12_16_8 "1K" R025W_AX04 260.633,128.389 r0 top
Designator12_16_9 "1K" R025W_AX04 260.633,142.359 r0 top
Designator12_16_10 "1K" R025W_AX04 260.633,156.329 r0 top
Designator12_16_11 "1K" R025W_AX04 260.633,170.299 r0 top
Designator12_16_12 "1K" R025W_AX04 260.633,184.269 r0 top
Designator12_16_13 "1K" R025W_AX04 260.633,198.239 r0 top
Designator12_16_14 "1K" R025W_AX04 260.633,212.209 r0 top
Designator12_17_2 "1K" R025W_AX04 274.603,44.569 r0 top
Designator12_17_3 "1K" R025W_AX04 274.603,58.539 r0 top
Designator12_17_4 "1K" R025W_AX04 274.603,72.509 r0 top
Designator12_17_5 "1K" R025W_AX04 274.603,86.479 r0 top
Designator12_17_6 "1K" R025W_AX04 274.603,100.449 r0 top
Designator12_17_7 "1K" R025W_AX04 274.603,114.419 r0 top
Designator12_17_8 "1K" R025W_AX04 274.603,128.389 r0 top
Designator12_17_9 "1K" R025W_AX04 274.603,142.359 r0 top
Designator12_17_10 "1K" R025W_AX04 274.603,156.329 r0 top
Designator12_17_11 "1K" R025W_AX04 274.603,170.299 r0 top
Designator12_17_12 "1K" R025W_AX04 274.603,184.269 r0 top
Designator12_17_13 "1K" R025W_AX04 274.603,198.239 r0 top
Designator12_17_14 "1K" R025W_AX04 274.603,212.209 r0 top
Designator12_18_2 "1K" R025W_AX04 288.573,44.569 r0 top
Designator12_18_3 "1K" R025W_AX04 288.573,58.539 r0 top
Designator12_18_4 "1K" R025W_AX04 288.573,72.509 r0 top
Designator12_18_5 "1K" R025W_AX04 288.573,86.479 r0 top
Designator12_18_6 "1K" R025W_AX04 288.573,100.449 r0 top
Designator12_18_7 "1K" R025W_AX04 288.573,114.419 r0 top
Designator12_18_8 "1K" R025W_AX04 288.573,128.389 r0 top
Designator12_18_9 "1K" R025W_AX04 288.573,142.359 r0 top
Designator12_18_10 "1K" R025W_AX04 288.573,156.329 r0 top
Designator12_18_11 "1K" R025W_AX04 288.573,170.299 r0 top
Designator12_18_12 "1K" R025W_AX04 288.573,184.269 r0 top
Designator12_18_13 "1K" R025W_AX04 288.573,198.239 r0 top
Designator12_18_14 "1K" R025W_AX04 288.573,212.209 r0 top
Designator13 "Comment" GMSTB762_2 298.831,137.668 r270 top

## Footprints (in the part's own frame and the unit in brackets; to place one, negate y for a bottom-side part, rotate by r counter-clockwise, add the part's x,y. Pads: shape width x height; smd on the part's side, far side on the other; paste and mask are expansions set on the pad)
GMSTB762_2 [mm] "PHOENIX, GMSTB 2,5/2-G-7,62, 7.62mm pitch, 2pin"
  round 3 hole 1.5: 1(-3.81,0) 2(3.81,0)
  silkscreen extent -6.8,-2 6.8,10.1, body extent -6.72,-1.9 6.72,10.1, height 9.1
LED5MM_RED [mm] "LED 5MM THROUGH HOLE RED-Designer Abbas Basereh"
  oval 1.2x1.6 hole 0.8: 1(-1.27,0) 2(1.27,0)
  silkscreen extent -3.1,-3.1 2.6,3.1, body extent -3,-3 2.5,3, height 9.14
R025W_AX04 [mm] "RESISTOR 1/4 WATT, AXIAL0.4"
  round 2 hole 1: 1(-5.1,0) 2(5.1,0)
  silkscreen extent -3.9,-1.3 3.9,1.3, body extent -5.38,-1.28 5.38,1.28, height 2.6

## Via types
v1: diameter 2, hole 1, Top Layer to Bottom Layer, 2 vias